# Altium PCB Copy of PCB_MolkkyV2.PcbDoc
Units mm, origin at the board's own origin, x right, y up, seen from the top; angles counter-clockwise.
Board outline 30.31 x 28.25 mm, 3 copper layers (Top Layer, Internal Plane 13, Bottom Layer); 22 components, 17 nets, 111 pads, 10 vias.
Unrouted connection lines stored in the file: 20.
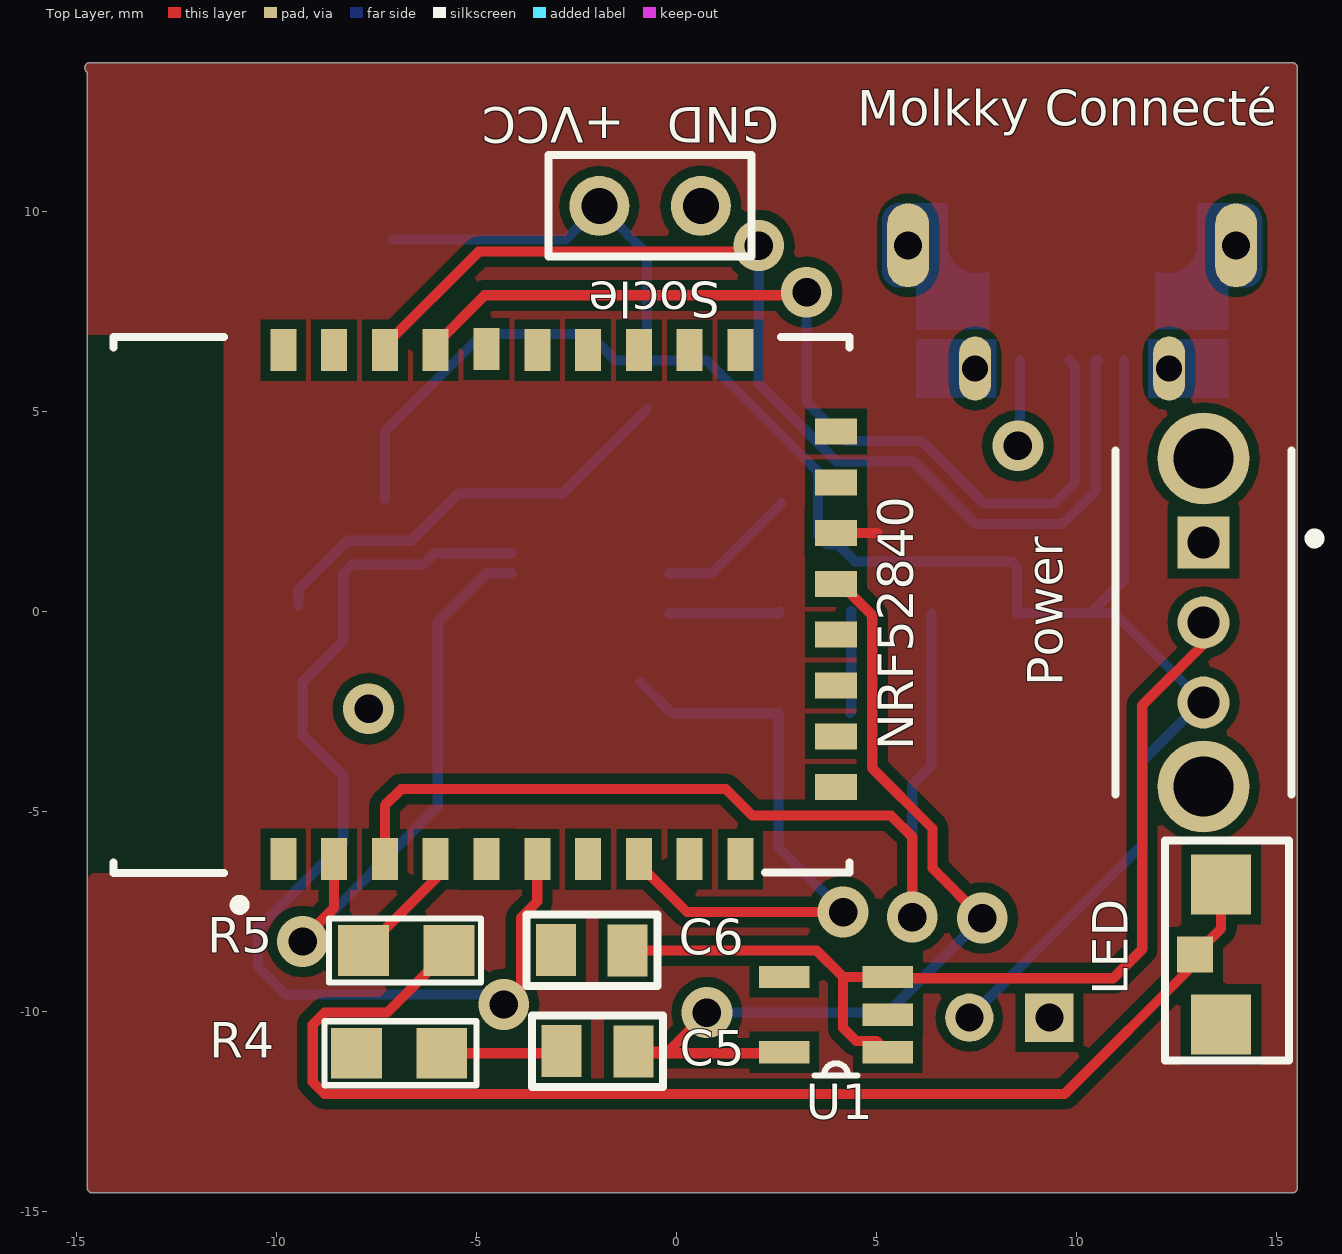
[diagram p0: Top Layer view]
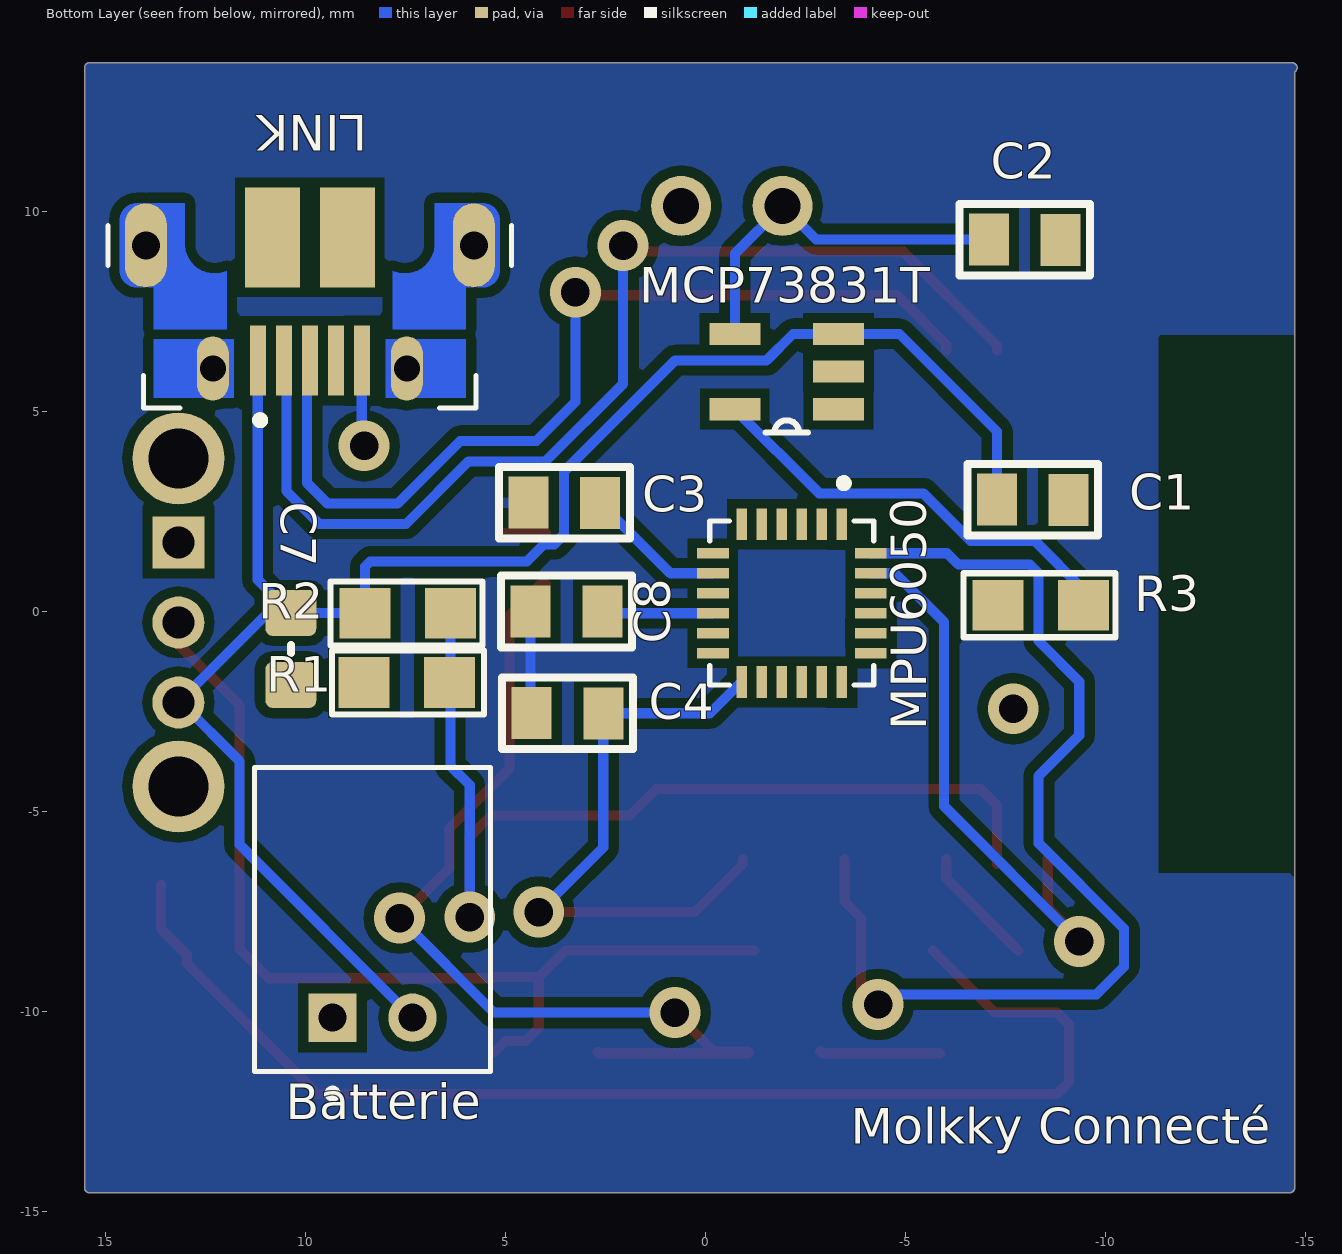
[diagram p1: Bottom Layer view, seen from below]
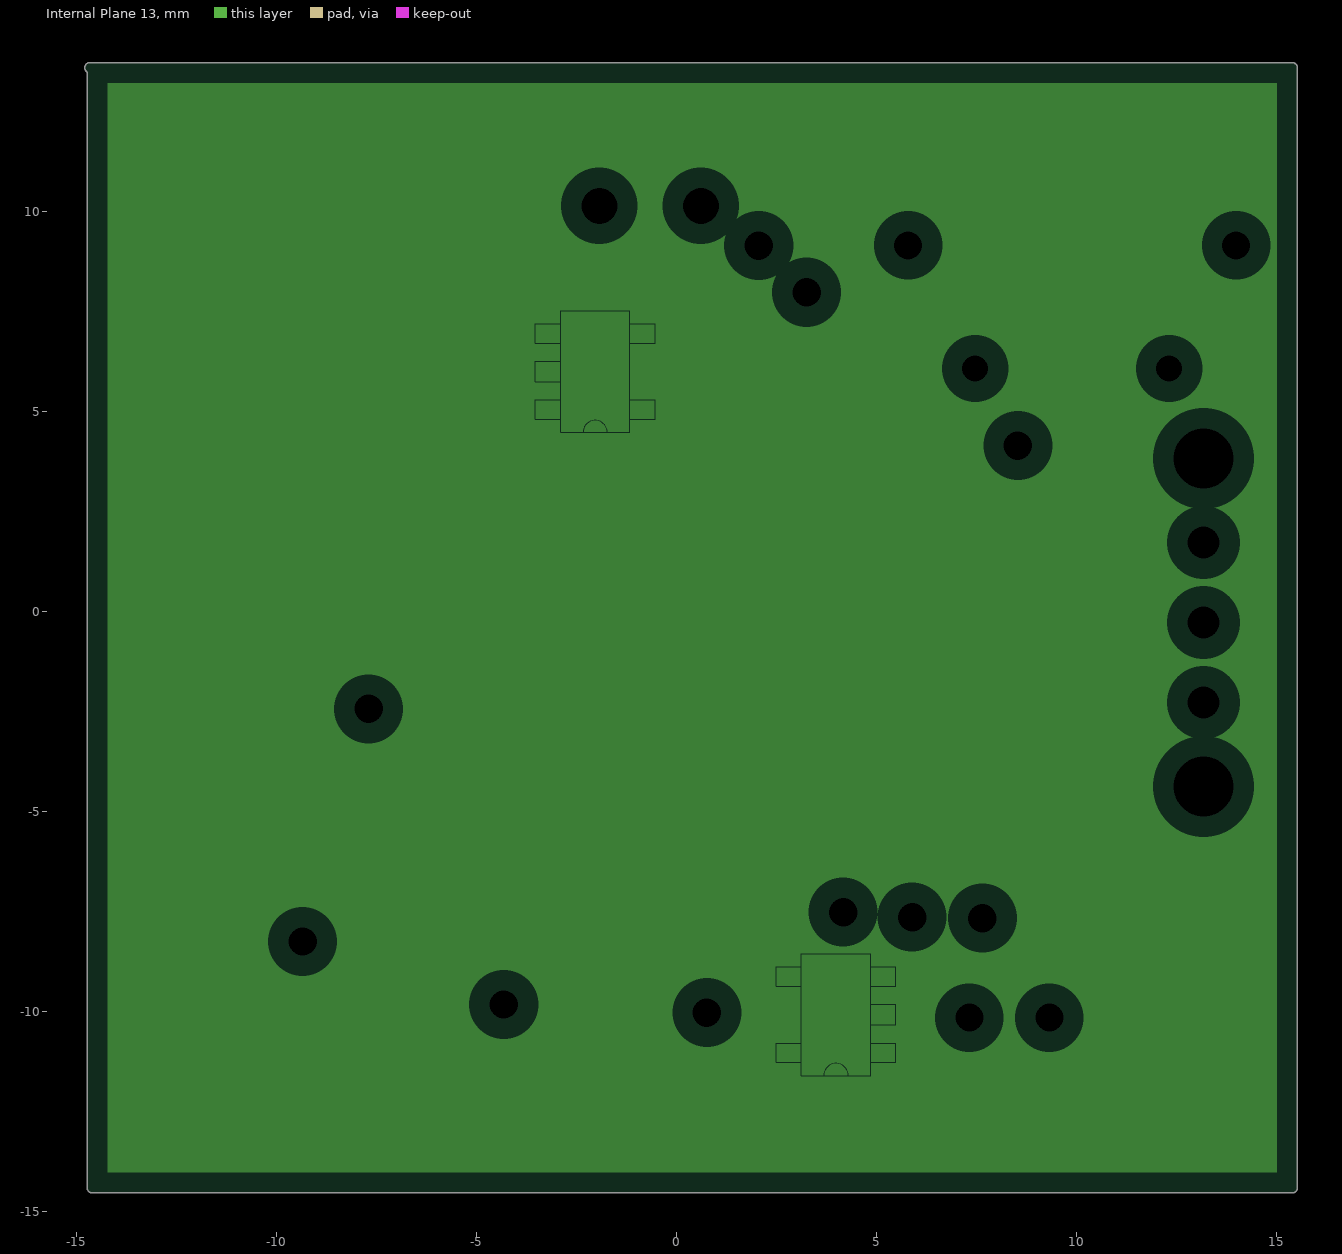
[diagram p2: Internal Plane 13, clearances drawn from the general rule]

## Layer stack, top to bottom
Top Solder: solder mask 0.0102, Solder Resist, Dk 3.5
Top Layer: signal copper 0.0356
Dielectric 1: dielectric 0.32, FR-4, Dk 4.8
Internal Plane 13: plane copper 0.0356
Dielectric2: dielectric 0.32, FR-4, Dk 4.8
Bottom Layer: signal copper 0.0356
Bottom Solder: solder mask 0.0102, Solder Resist, Dk 3.5

## Board outline
-14.732,-14.411 -14.732,13.481 cw(c-14.665,13.589) -14.665,13.716 15.335,13.716 cw(c15.335,13.589) 15.365,13.713 cw(c15.395,13.589) 15.522,13.589 15.522,-14.411 cw(c15.395,-14.411) 15.395,-14.538 -14.605,-14.538 cw(c-14.605,-14.411)

## Design rules (kind name [scope] priority, off if disabled: settings)
Clearance [All] p1: gap=0.254 ignorepadtopadclearanceinfootprint=FALSE except(0: Arc-Hole Track-Hole SMDPad-Hole THPad-Hole Via-Hole Fill-Hole Poly-Hole Region-Hole Text-Hole; 0.242: SMDPad-SMDPad SMDPad-THPad SMDPad-Via SMDPad-Fill SMDPad-Poly SMDPad-Region SMDPad-Text THPad-THPad THPad-Via THPad-Fill THPad-Poly THPad-Region THPad-Text)
PlaneClearance [All] p1: clearance=0.508
PlaneConnect [All] p1: planeconnectstyle=Relief reliefexpansion=0.508 reliefentries=4 reliefconductorwidth=0.254 reliefairgap=0.254
PolygonConnect [All] p1: connectstyle=Relief reliefconductorwidth=0.254 reliefentries=4 polygonreliefangle="90 Angle" airgapwidth=0.254
RoutingVias [All] p1: holewidth=0.711 width=1.27 viastyle="Through Hole" minholewidth=0.711 minwidth=1.27 maxholewidth=0.711 maxwidth=1.27
SolderMaskExpansion [All] p1: expansion=0.102
Width [All] p1: maxlimit=0.4 minlimit=0.24 preferedwidth=0.254 minimp=50.000000 maximp=50.000000 favimp=50.000000
28 further rules are at their usual default settings.

## Classes and differential pairs
component class MolkkyV2: C1 C2 C3 C4 C5 C6 C7 C8 LED Link MCP73831T MPU6050 NRF52840 R1 R2 R3 R4 R5 Socle

## Components (designator, comment, footprint, x,y, rotation, side; value= is the part's Value field where it differs from the comment)
Batterie "S2B-PH-K-S(LF)(SN)" *JST_S2B-PH-K-S(LF)(SN) 8.322,-10.16 r0 bottom (schematic designator ConnecteurBatt)
C1 "CMS_0805" CONDENSATEUR_CMS_0805 -9.08,2.784 r0 bottom value=4.7uF
C2 "CMS_0805" CONDENSATEUR_CMS_0805 -8.877,9.286 r0 bottom value=4.7uF
C3 "CMS_0805" CONDENSATEUR_CMS_0805 2.63,2.708 r0 bottom value="10 nF"
C4 "CMS_0805" CONDENSATEUR_CMS_0805 2.553,-2.55 r0 bottom value="0.1 uF"
C5 "CMS_0805" CONDENSATEUR_CMS_0805 -1.08,-11.008 r180 top value="4.7 uF"
C6 "CMS_0805" CONDENSATEUR_CMS_0805 -1.219,-8.484 r180 top value="1 uF"
C7 "100n" CAPC2013X100N-0805-NoOverlay 10.363,-0.94 r0 bottom
C8 "CMS_0805" CONDENSATEUR_CMS_0805 2.579,-0.01 r0 bottom value="0.1 uF"
LED "LED_3MM" LED_Angle_droit 13.614,-10.333 r180 top (schematic designator D1)
LINK "10103592-0001LF" *AMPHENOL_10103592-0001LF_10103592-0001LF(Primary) 9.891,9.149 r0 bottom (schematic designator J1)
MCP73831T "MCP73831T-2ACI/OT" *SOT95P280X145-5N -2.032,5.994 r0 bottom (schematic designator 1)
MPU6050 "MPU-6050" *QFN50P400X400X95-24N -2.159,0.203 r270 bottom (schematic designator U2)
NRF52840 "NRF52840 kit" uC_NRF52840 39.497,32.029 r90 top locked (schematic designator uC)
Power "Switch_C&K_OS102011MA1QN1_eec" C&K_OS102011MA1QN1_0 11.176,-0.279 r270 top (schematic designator SW1)
R1 "RESISTANCE_CMS_0805" RESISTANCE_CMS_0805 8.534,-1.778 r180 bottom value=100K
R2 "RESISTANCE_CMS_0805" RESISTANCE_CMS_0805 6.375,-0.051 r0 bottom value=100K
R3 "RESISTANCE_CMS_0805" RESISTANCE_CMS_0805 -9.449,0.152 r0 bottom value=10K
R4 "RESISTANCE_CMS_0805" RESISTANCE_CMS_0805 -8.001,-11.049 r0 top value=1
R5 "RESISTANCE_CMS_0805" RESISTANCE_CMS_0805 -5.69,-8.484 r180 top value=2.2K
Socle "ConnecteurCharge" "BARRETTE 2" 3.15,10.135 r180 top (schematic designator *)
U1 "TPS76333DBVT" *SOT95P280X145-5N 3.988,-10.084 r180 top

## Footprints (in the part's own frame and the unit in brackets; to place one, negate y for a bottom-side part, rotate by r counter-clockwise, add the part's x,y. Pads: shape width x height; smd on the part's side, far side on the other; paste and mask are expansions set on the pad)
*AMPHENOL_10103592-0001LF_10103592-0001LF(Primary) [mm]
  rect 0.4x1.75 smd: 1(1.3,2.875) 2(0.65,2.875) 3(0,2.875) 4(-0.65,2.875) 5(-1.3,2.875)
  oval 0.8x1.6 hole 0.65: P1(-2.425,3.08) P2(2.425,3.08)
  oval 1.05x2.1 hole 0.7: P3(-4.1,0) P6(4.1,0)
  rect 1.375x2.5 smd: P4(-0.937,-0.2) P5(0.937,-0.2)
  Top Layer region: -3.9,3.81 -2.65,3.81 -2.656,3.807 -2.664,3.801 -2.673,3.794 -2.682,3.788 -2.69,3.781 -2.698,3.774 -2.706,3.767 -2.714,3.76 -2.721,3.752 -2.729,3.744 -2.736,3.736 -2.743,3.728 -2.749,3.72 -2.755,3.711 -2.762,3.702 -2.767,3.693 -2.773,3.684 -2.778,3.675 -2.783,3.666 -2.788,3.656 -2.792,3.646 -2.797,3.636 -2.8,3.626 -2.804,3.616 -2.807,3.606 -2.81,3.596 -2.813,3.586 -2.816,3.575 -2.818,3.565 -2.819,3.554 -2.82,3.55 -2.81,2.59 -2.808,2.584 -2.805,2.573 -2.802,2.563 -2.798,2.553 -2.794,2.543 -2.79,2.533 -2.785,2.523 -2.781,2.514 -2.775,2.504 -2.77,2.495 -2.764,2.486 -2.759,2.477 -2.752,2.468 -2.746,2.459 -2.739,2.451 -2.732,2.443 -2.725,2.435 -2.718,2.427 -2.71,2.419 -2.702,2.412 -2.694,2.405 -2.686,2.398 -2.678,2.391 -2.669,2.385 -2.66,2.379 -2.651,2.373 -2.642,2.367 -2.633,2.362 -2.623,2.357 -2.614,2.352 -2.61,2.35 -3.9,2.35
  Top Layer region: -2.2,3.81 -1.9,3.81 -1.9,2.35 -2.21,2.35 -2.207,2.352 -2.198,2.357 -2.189,2.363 -2.18,2.37 -2.171,2.376 -2.162,2.383 -2.154,2.39 -2.146,2.397 -2.138,2.405 -2.13,2.412 -2.123,2.42 -2.116,2.428 -2.109,2.437 -2.102,2.445 -2.095,2.454 -2.089,2.463 -2.083,2.472 -2.077,2.481 -2.072,2.491 -2.067,2.5 -2.062,2.51 -2.057,2.52 -2.053,2.53 -2.049,2.54 -2.045,2.55 -2.042,2.56 -2.039,2.571 -2.036,2.581 -2.033,2.592 -2.031,2.603 -2.03,2.61 -2.04,3.58 -2.041,3.583 -2.043,3.592 -2.045,3.6 -2.048,3.609 -2.051,3.618 -2.054,3.626 -2.057,3.635 -2.061,3.643 -2.065,3.651 -2.069,3.659 -2.073,3.667 -2.078,3.675 -2.083,3.683 -2.088,3.69 -2.093,3.698 -2.098,3.705 -2.104,3.712 -2.11,3.719 -2.116,3.726 -2.122,3.732 -2.129,3.739 -2.135,3.745 -2.142,3.751 -2.149,3.757 -2.156,3.762 -2.164,3.768 -2.171,3.773 -2.179,3.778 -2.187,3.783 -2.195,3.787 -2.2,3.79
  Top Layer region: 3.9,3.81 2.65,3.81 2.656,3.807 2.664,3.801 2.673,3.794 2.682,3.788 2.69,3.781 2.698,3.774 2.706,3.767 2.714,3.76 2.721,3.752 2.729,3.744 2.736,3.736 2.743,3.728 2.749,3.72 2.755,3.711 2.762,3.702 2.767,3.693 2.773,3.684 2.778,3.675 2.783,3.666 2.788,3.656 2.792,3.646 2.797,3.636 2.8,3.626 2.804,3.616 2.807,3.606 2.81,3.596 2.813,3.586 2.816,3.575 2.818,3.565 2.819,3.554 2.82,3.55 2.81,2.59 2.808,2.584 2.805,2.573 2.802,2.563 2.798,2.553 2.794,2.543 2.79,2.533 2.785,2.523 2.781,2.514 2.775,2.504 2.77,2.495 2.764,2.486 2.759,2.477 2.752,2.468 2.746,2.459 2.739,2.451 2.732,2.443 2.725,2.435 2.718,2.427 2.71,2.419 2.702,2.412 2.694,2.405 2.686,2.398 2.678,2.391 2.669,2.385 2.66,2.379 2.651,2.373 2.642,2.367 2.633,2.362 2.623,2.357 2.614,2.352 2.61,2.35 3.9,2.35
  Top Layer region: 2.2,3.81 1.9,3.81 1.9,2.35 2.21,2.35 2.207,2.352 2.198,2.357 2.189,2.363 2.18,2.37 2.171,2.376 2.162,2.383 2.154,2.39 2.146,2.397 2.138,2.405 2.13,2.412 2.123,2.42 2.116,2.428 2.109,2.437 2.102,2.445 2.095,2.454 2.089,2.463 2.083,2.472 2.077,2.481 2.072,2.491 2.067,2.5 2.062,2.51 2.057,2.52 2.053,2.53 2.049,2.54 2.045,2.55 2.042,2.56 2.039,2.571 2.036,2.581 2.033,2.592 2.031,2.603 2.03,2.61 2.04,3.58 2.041,3.583 2.043,3.592 2.045,3.6 2.048,3.609 2.051,3.618 2.054,3.626 2.057,3.635 2.061,3.643 2.065,3.651 2.069,3.659 2.073,3.667 2.078,3.675 2.083,3.683 2.088,3.69 2.093,3.698 2.098,3.705 2.104,3.712 2.11,3.719 2.116,3.726 2.122,3.732 2.129,3.739 2.135,3.745 2.142,3.751 2.149,3.757 2.156,3.762 2.164,3.768 2.171,3.773 2.179,3.778 2.187,3.783 2.195,3.787 2.2,3.79
  Top Layer region: 2.075,2.1 3.9,2.1 3.9,1.05 4.075,1.05 4.075,1.045 4.058,1.044 4.033,1.042 4.008,1.038 3.983,1.033 3.958,1.026 3.934,1.019 3.91,1.01 3.887,1 3.864,0.989 3.842,0.977 3.82,0.964 3.799,0.95 3.779,0.935 3.759,0.918 3.74,0.901 3.723,0.883 3.706,0.864 3.69,0.844 3.675,0.824 3.661,0.803 3.648,0.781 3.637,0.758 3.626,0.735 3.617,0.712 3.608,0.688 3.601,0.663 3.595,0.639 3.591,0.614 3.587,0.588 3.585,0.563 3.585,0.555 3.58,-0.53 3.58,-0.538 3.581,-0.564 3.584,-0.59 3.588,-0.615 3.593,-0.641 3.599,-0.666 3.607,-0.69 3.615,-0.714 3.625,-0.738 3.636,-0.762 3.649,-0.784 3.662,-0.806 3.676,-0.828 3.692,-0.848 3.708,-0.868 3.726,-0.887 3.744,-0.905 3.763,-0.922 3.783,-0.939 3.804,-0.954 3.825,-0.968 3.848,-0.981 3.87,-0.993 3.894,-1.004 3.918,-1.014 3.942,-1.022 3.967,-1.029 3.992,-1.035 4.017,-1.04 4.043,-1.044 4.06,-1.045 4.06,-1.05 3.125,-1.05 3.125,0 3.123,0.029 3.117,0.076 3.107,0.123 3.095,0.17 3.079,0.215 3.061,0.26 3.04,0.303 3.016,0.345 2.99,0.385 2.961,0.423 2.93,0.46 2.896,0.494 2.86,0.526 2.823,0.556 2.783,0.583 2.742,0.608 2.699,0.63 2.655,0.649 2.61,0.666 2.564,0.679 2.517,0.69 2.47,0.697 2.422,0.702 2.374,0.703 2.326,0.702 2.278,0.697 2.231,0.689 2.184,0.678 2.138,0.665 2.093,0.648 2.075,0.64
  Top Layer region: 4.13,1.05 4.341,1.05 4.363,1.049 4.385,1.047 4.407,1.043 4.428,1.039 4.449,1.033 4.47,1.026 4.491,1.018 4.511,1.009 4.53,0.999 4.55,0.988 4.568,0.976 4.586,0.963 4.603,0.949 4.619,0.935 4.635,0.919 4.649,0.903 4.663,0.886 4.676,0.868 4.688,0.85 4.699,0.83 4.709,0.811 4.718,0.791 4.726,0.77 4.733,0.749 4.739,0.728 4.743,0.707 4.747,0.685 4.749,0.663 4.75,0.641 4.75,-0.641 4.749,-0.663 4.747,-0.685 4.743,-0.707 4.739,-0.728 4.733,-0.749 4.726,-0.77 4.718,-0.791 4.709,-0.811 4.699,-0.83 4.688,-0.85 4.676,-0.868 4.663,-0.886 4.649,-0.903 4.635,-0.919 4.619,-0.935 4.603,-0.949 4.586,-0.963 4.568,-0.976 4.55,-0.988 4.53,-0.999 4.511,-1.009 4.491,-1.018 4.47,-1.026 4.449,-1.033 4.428,-1.039 4.407,-1.043 4.385,-1.047 4.363,-1.049 4.341,-1.05 4.105,-1.05 4.105,-1.045 4.116,-1.045 4.143,-1.044 4.17,-1.041 4.197,-1.037 4.223,-1.031 4.25,-1.024 4.275,-1.015 4.301,-1.006 4.325,-0.995 4.35,-0.982 4.373,-0.969 4.396,-0.954 4.418,-0.938 4.439,-0.921 4.459,-0.903 4.478,-0.884 4.496,-0.864 4.513,-0.843 4.529,-0.821 4.544,-0.798 4.557,-0.775 4.57,-0.75 4.581,-0.726 4.59,-0.7 4.599,-0.675 4.606,-0.648 4.612,-0.622 4.616,-0.595 4.619,-0.568 4.62,-0.541 4.62,-0.525 4.62,0.555 4.62,0.563 4.618,0.588 4.614,0.614 4.61,0.639 4.604,0.663 4.597,0.688 4.588,0.712 4.579,0.735 4.568,0.758 4.557,0.781 4.544,0.803 4.53,0.824 4.515,0.844 4.499,0.864 4.482,0.883 4.465,0.901 4.446,0.918 4.426,0.935 4.406,0.95 4.385,0.964 4.363,0.977 4.341,0.989 4.318,1 4.295,1.01 4.271,1.019 4.247,1.026 4.222,1.033 4.197,1.038 4.172,1.042 4.147,1.044 4.13,1.045
  Top Layer region: -2.075,2.1 -3.9,2.1 -3.9,1.05 -4.075,1.05 -4.075,1.045 -4.058,1.044 -4.033,1.042 -4.008,1.038 -3.983,1.033 -3.958,1.026 -3.934,1.019 -3.91,1.01 -3.887,1 -3.864,0.989 -3.842,0.977 -3.82,0.964 -3.799,0.95 -3.779,0.935 -3.759,0.918 -3.74,0.901 -3.723,0.883 -3.706,0.864 -3.69,0.844 -3.675,0.824 -3.661,0.803 -3.648,0.781 -3.637,0.758 -3.626,0.735 -3.617,0.712 -3.608,0.688 -3.601,0.663 -3.595,0.639 -3.591,0.614 -3.587,0.588 -3.585,0.563 -3.585,0.555 -3.58,-0.53 -3.58,-0.538 -3.581,-0.564 -3.584,-0.59 -3.588,-0.615 -3.593,-0.641 -3.599,-0.666 -3.607,-0.69 -3.615,-0.714 -3.625,-0.738 -3.636,-0.762 -3.649,-0.784 -3.662,-0.806 -3.676,-0.828 -3.692,-0.848 -3.708,-0.868 -3.726,-0.887 -3.744,-0.905 -3.763,-0.922 -3.783,-0.939 -3.804,-0.954 -3.825,-0.968 -3.848,-0.981 -3.87,-0.993 -3.894,-1.004 -3.918,-1.014 -3.942,-1.022 -3.967,-1.029 -3.992,-1.035 -4.017,-1.04 -4.043,-1.044 -4.06,-1.045 -4.06,-1.05 -3.125,-1.05 -3.125,0 -3.123,0.029 -3.117,0.076 -3.107,0.123 -3.095,0.17 -3.079,0.215 -3.061,0.26 -3.04,0.303 -3.016,0.345 -2.99,0.385 -2.961,0.423 -2.93,0.46 -2.896,0.494 -2.86,0.526 -2.823,0.556 -2.783,0.583 -2.742,0.608 -2.699,0.63 -2.655,0.649 -2.61,0.666 -2.564,0.679 -2.517,0.69 -2.47,0.697 -2.422,0.702 -2.374,0.703 -2.326,0.702 -2.278,0.697 -2.231,0.689 -2.184,0.678 -2.138,0.665 -2.093,0.648 -2.075,0.64
  Top Layer region: -4.13,1.05 -4.341,1.05 -4.363,1.049 -4.385,1.047 -4.407,1.043 -4.428,1.039 -4.449,1.033 -4.47,1.026 -4.491,1.018 -4.511,1.009 -4.53,0.999 -4.55,0.988 -4.568,0.976 -4.586,0.963 -4.603,0.949 -4.619,0.935 -4.635,0.919 -4.649,0.903 -4.663,0.886 -4.676,0.868 -4.688,0.85 -4.699,0.83 -4.709,0.811 -4.718,0.791 -4.726,0.77 -4.733,0.749 -4.739,0.728 -4.743,0.707 -4.747,0.685 -4.749,0.663 -4.75,0.641 -4.75,-0.641 -4.749,-0.663 -4.747,-0.685 -4.743,-0.707 -4.739,-0.728 -4.733,-0.749 -4.726,-0.77 -4.718,-0.791 -4.709,-0.811 -4.699,-0.83 -4.688,-0.85 -4.676,-0.868 -4.663,-0.886 -4.649,-0.903 -4.635,-0.919 -4.619,-0.935 -4.603,-0.949 -4.586,-0.963 -4.568,-0.976 -4.55,-0.988 -4.53,-0.999 -4.511,-1.009 -4.491,-1.018 -4.47,-1.026 -4.449,-1.033 -4.428,-1.039 -4.407,-1.043 -4.385,-1.047 -4.363,-1.049 -4.341,-1.05 -4.105,-1.05 -4.105,-1.045 -4.116,-1.045 -4.143,-1.044 -4.17,-1.041 -4.197,-1.037 -4.223,-1.031 -4.25,-1.024 -4.275,-1.015 -4.301,-1.006 -4.325,-0.995 -4.35,-0.982 -4.373,-0.969 -4.396,-0.954 -4.418,-0.938 -4.439,-0.921 -4.459,-0.903 -4.478,-0.884 -4.496,-0.864 -4.513,-0.843 -4.529,-0.821 -4.544,-0.798 -4.557,-0.775 -4.57,-0.75 -4.581,-0.726 -4.59,-0.7 -4.599,-0.675 -4.606,-0.648 -4.612,-0.622 -4.616,-0.595 -4.619,-0.568 -4.62,-0.541 -4.62,-0.525 -4.62,0.555 -4.62,0.563 -4.618,0.588 -4.614,0.614 -4.61,0.639 -4.604,0.663 -4.597,0.688 -4.588,0.712 -4.579,0.735 -4.568,0.758 -4.557,0.781 -4.544,0.803 -4.53,0.824 -4.515,0.844 -4.499,0.864 -4.482,0.883 -4.465,0.901 -4.446,0.918 -4.426,0.935 -4.406,0.95 -4.385,0.964 -4.363,0.977 -4.341,0.989 -4.318,1 -4.295,1.01 -4.271,1.019 -4.247,1.026 -4.222,1.033 -4.197,1.038 -4.172,1.042 -4.147,1.044 -4.13,1.045
  silkscreen extent -5.04,-0.5 5.04,4.47
*JST_S2B-PH-K-S(LF)(SN) [mm]
  rect 1.208x1.208 hole 0.7: 1(1,0)
  round 1.208 hole 0.7: 2(-1,0)
  silkscreen extent -2.95,-6.25 2.95,2
*QFN50P400X400X95-24N [mm]
  rect 0.79x0.26 smd: 1(-1.97,1.25) 2(-1.97,0.75) 3(-1.97,0.25) 4(-1.97,-0.25) 5(-1.97,-0.75) 6(-1.97,-1.25) 13(1.97,-1.25) 14(1.97,-0.75) 15(1.97,-0.25) 16(1.97,0.25) 17(1.97,0.75) 18(1.97,1.25)
  rect 0.26x0.79 smd: 7(-1.25,-1.97) 8(-0.75,-1.97) 9(-0.25,-1.97) 10(0.25,-1.97) 11(0.75,-1.97) 12(1.25,-1.97) 19(1.25,1.97) 20(0.75,1.97) 21(0.25,1.97) 22(-0.25,1.97) 23(-0.75,1.97) 24(-1.25,1.97)
  silkscreen extent -3.1,-2.05 2.05,2.05
*SOT95P280X145-5N [mil]
  rect 50x22 smd: 1(-51,37) 2(-51,0) 3(-51,-37) 4(51,-37) 5(51,37)
  Internal Plane 13 lines w0: -59,47 -34,47 ; -59,47 -59,28 ; -59,47 -34,47 ; -59,47 -59,28 ; -59,28 -34,28 ; -59,28 -34,28 ; -59,10 -34,10 ; -59,10 -59,-10 ; -59,10 -34,10 ; -59,10 -59,-10 ; -59,-10 -34,-10 ; -59,-10 -34,-10 ; -59,-28 -34,-28 ; -59,-28 -59,-47 ; -59,-28 -34,-28 ; -59,-28 -59,-47 ; -59,-47 -34,-47 ; -59,-47 -34,-47 ; -34,60 -12,60 ; -34,60 -34,47 ; -34,60 -12,60 ; -34,60 -34,47 ; -34,47 -34,28 ; -34,47 -34,28 ; -34,28 -34,10 ; -34,28 -34,10 ; -34,10 -34,-10 ; -34,10 -34,-10 ; -34,-10 -34,-28 ; -34,-10 -34,-28 ; -34,-28 -34,-47 ; -34,-28 -34,-47 ; -34,-47 -34,-60 ; -34,-47 -34,-60 ; -34,-60 34,-60 ; -34,-60 34,-60 ; -12,60 ccw(c0,60) 12,60 ; -12,60 ccw(c0,60) 12,60 ; -12,60 12,60 ; -12,60 12,60 ; 12,60 34,60 ; 12,60 34,60 ; 34,60 34,47 ; 34,60 34,47 ; 34,47 34,28 ; 34,47 59,47 ; 34,47 34,28 ; 34,47 59,47 ; 34,28 34,-28 ; 34,28 59,28 ; 34,28 34,-28 ; 34,28 59,28 ; 34,-28 34,-47 ; 34,-28 59,-28 ; 34,-28 34,-47 ; 34,-28 59,-28 ; 34,-47 34,-60 ; 34,-47 59,-47 ; 34,-47 34,-60 ; 34,-47 59,-47 ; 59,47 59,28 ; 59,47 59,28 ; 59,-28 59,-47 ; 59,-28 59,-47
  silkscreen extent -21,48 21,60
"BARRETTE 2" [mm] "BARRETTE 3 CONTACTS ; 1 RANGEE ; DROITE ; MALE ; ESPACEMENT BROCHES = 2.54 mm"
  round 1.5 hole 0.9: 1(2.54,0) 2(5.08,0)
  silkscreen extent 1.27,-1.27 6.35,1.27
C&K_OS102011MA1QN1_0 [mm]
  rect 1.3x1.3 hole 0.8 paste-1000 mask+0: 1(-2,2)
  round 1.3 hole 0.8 paste-1000 mask+0: 2(0,2) 3(2,2)
  round 2.3 hole 1.5 paste-1000 mask+0: 4(-4.1,2) 5(4.1,2)
  silkscreen extent -4.3,-0.2 4.3,4.9, body extent -5.35,-4.3 5.35,4.3, height 0.25
CAPC2013X100N-0805-NoOverlay [mm] "Capacitor,non-polarized,Chip;2.00mm L X 1.25mm W X 1.00mm H"
  rrect30% 1.27x1.15 smd: 1(0,0.9) 2(0,-0.9)
  silkscreen extent 0,-0.1 0,0.1, body extent -0.62,-1 0.63,1, height 0.6
CONDENSATEUR_CMS_0805 [mm] "CONDENSATEUR CMS 0805 ; DIMENSIONS : 2mm x 1.25mm"
  rect 1x1.3 smd: 1(0,0) 2(1.79,-0.01)
  silkscreen extent -0.74,-0.9 2.53,0.89, body extent -0.09,-0.67 1.91,0.64, height 0.73
LED_Angle_droit [mm] "LED CMS 0805 ; DIMENSIONS : 2.0mm x 0.9mm"
  rect 1.5x1.5 smd: 1(0,-3.5) 2(0,0)
  rect 0.9x0.9 smd: 1(0.65,-1.75)
  silkscreen extent -1.7,-4.6 1.4,0.9, body extent -1.5,-3.35 2.7,-0.25, height 2
RESISTANCE_CMS_0805 [mil] "RESISTANCE CMS 0805 ; DIMENSIONS : 2mm x 1.25mm"
  rect 50x50 smd: 1(0,0) 2(84,0)
  silkscreen extent -31,-31 118,31, body extent 4,-24 83,26, height 31
uC_NRF52840 [mm] "QFN, 40-Leads, Body 13,05x18,05mm, Pitch 1,27mm, Thermal Pad 8,90x8,90mm, IPC Medium Density"
  rect 1.05x0.65 smd: 1(-38.227,49.327) 2(-38.227,48.057) 3(-38.227,46.787) 4(-38.227,45.517) 5(-38.227,44.247) 6(-38.227,42.977) 7(-38.227,41.707) 8(-38.227,40.437) 9(-38.227,39.167) 10(-38.227,37.897) 21(-25.502,37.897) 22(-25.502,39.167) 23(-25.502,40.437) 24(-25.5,41.708) 25(-25.502,42.977) 26(-25.476,44.247) 27(-25.502,45.517) 28(-25.502,46.787) 29(-25.502,48.057) 30(-25.502,49.327)
  rect 0.65x1.05 smd: 11(-36.424,35.509) 12(-35.154,35.509) 13(-33.884,35.509) 14(-32.614,35.509) 15(-31.344,35.509) 16(-30.074,35.509) 17(-28.804,35.509) 18(-27.534,35.509)
  silkscreen extent -39.49,35.17 -25.18,53.57, body extent -38.43,35.31 -25.6,53.29, height 3.1

## Part data
Batterie: "PH Series 2 Position 2.0 mm Through Hole Side Entry Shrouded Header", Package=None, Availability=Unavailable, MF="JST Sales", MP=S2B-PH-K-S_LF__SN_, Price=None, SnapEDA_Link=https://www.snapeda.com/parts/S2B-PH-K-S%28LF%29%28SN%29/JST%20Sales%20America%20Inc./view-part/?ref=snap
C1 C2 C3 C4 C5 C6 C8: library part CONDENSATEUR_CMS_CER_0805, "CONDENSATEUR CMS CERAMIQUE 0805"
C7: library part 0100000001868, Manufacturer=Yageo, Manufacturer Part Number=CC0805KRX7R9BB104, Package Case=0805, Recommended Rating=Platinum, Temperature Coefficient=X7R, Tolerance=10%, Voltage Rated=50, Assembly=SMD, Barcode=0100000001868, Capacitance=100n, Category=Capacitors, Family="CERAMIC CAPACITOR", id=136, item_id=450, Part Type=Capacitors
LED: library part "LED Angle droit", "LED Angle droit - ROUGE", Type=LED_Angle_droit
LINK: "Micro Usb, 2.0 Type b, Rcpt, Smt", Package=None, Availability=Unavailable, MF="Amphenol ICC", MP=10103592-0001LF, Price=None, SnapEDA_Link=https://www.snapeda.com/parts/10103592-0001LF/Amphenol%20ICC/view-part/?ref=snap
MCP73831T: "MCP73831 Series Single-Cell Li-Ion/Li-Polymer Battery Charge Controller SOT-23-5", Package="SOT-23 Microchip", Availability=Unavailable, MF=Microchip, MP=MCP73831T-2ACI/OT, Price=None, SnapEDA_Link=https://www.snapeda.com/parts/MCP73831T-2ACI/OT/Microchip/view-part/?ref=snap
MPU6050: "3-axis gyroscope, 3-axis accelerometer in a 4x4x0.9 housing", Package="QFN-24 InvenSense", Availability=Unavailable, MF="TDK InvenSense", MP=MPU-6050, Price=None, SnapEDA_Link=https://www.snapeda.com/parts/MPU-6050/TDK%20InvenSense/view-part/?ref=snap
NRF52840: Supplier Part Number 1=NRF52840-QIAA-R, Supplier 1=TME
Power: "SWITCH SLIDE SPDT 100MA 12V", Digikey Part Number=CKN9559-ND, Manufacturer=C&K, Mouser Part Number=OS102011MA1QN1, Package=SW_SLIDE, Temperature="-30°C to +70°C", Temperature Range High=+70°C, Temperature Range Low=-30°C, ComponentLink1Description=Upverter, ComponentLink1URL=https://upverter.com/upn/revision/2b2ed0fd4d150582/, ComponentLink2Description=Datasheet, ComponentLink2URL=https://www.ckswitches.com/media/1428/os.pdf, Digikey Description="SWITCH SLIDE SPDT 100MA 12V", helpURL=https://upverter.com/upn/revision/2b2ed0fd4d150582/, Lead Free=yes, Part Number=OS102011MA1QN1, Price=0.290275964971, RoHS=TRUE, Supplier 1=Digi-Key, Supplier 2=Mouser, Supplier Part Number 1=CKN9559-ND, Supplier Part Number 2=OS102011MA1QN1
R1 R2 R3 R4 R5: "RESISTANCE CMS 0805", Type=CMS_0805
Socle: library part "Barrette 2"
U1: "LDO voltage regulator [Texas Instruments] TPS76333DBVT LDO voltage regulator", Package="SOT-23-5 Texas Instruments", Availability=Unavailable, MF="Texas Instruments", MP=TPS76333DBVT, Price=None, SnapEDA_Link=https://www.snapeda.com/parts/TPS76333DBVT/Texas%20Instruments/view-part/?ref=snap

## Via types
v1: diameter 1.27, hole 0.711, Top Layer to Bottom Layer, 10 vias

## Nets (pads, with @x,y where several pads share a name; then routed paths per layer and width w, separated by ;. In a path a pad name is that pad's centre, name@x,y a point inside that pad or via, vN(x,y) a via of type N, cw(c..) or ccw(c..) an arc to the next point about the centre after c; other vN are vias at no path point)
3v3: Batterie.2 C1.2 C7.2 LINK.1 MCP73831T.3 Power.3 R2.2 | length 45.6
  Bottom Layer w0.254: C1.2 -7.29,4.496 -4.851,6.934 MCP73831T.3 -2.19,6.934 -1.529,6.274 0.752,6.274 3.539,3.488 3.539,1.91 3.772,1.676 4.033,1.676 4.465,1.245 8.382,1.245 8.509,1.118 R2.2 8.52,-0.04 C7.2 ; Batterie.2 11.645,-5.837 11.645,-3.745 13.111,-2.279 Power.3 10.936,-0.04 C7.2 ; LINK.1 11.191,0.788 C7.2
GND: Batterie.1 C1.1 C2.1 C3.2 C4.2 C6.2 C7.1 C8.2 LED.2 LINK.5 MCP73831T.2 MPU6050.1 MPU6050.18 MPU6050.20 NRF52840.5 NRF52840.16 R1.1 R3.2 R4.1 Socle.1 U1.2 | length 5.7
  Top Layer w0.254: NRF52840.16 5.022,1.956
  Bottom Layer w0.254: C4.2 4.369,-2.515 C8.2 ; v1(8.534,4.14) 8.591,4.197 LINK.5
  other v1: -7.696,-2.438
LED: NRF52840.4 R5.2 | length 3
  Top Layer w0.254: R5.2 -6.02,-6.68 NRF52840.4
Net1_5: MCP73831T.5 R3.1 | length 11
  Bottom Layer w0.254: R3.1 -9.449,0.546 -8.232,1.763 -6.632,1.763 -5.446,2.949 -2.842,2.949 MCP73831T.5
Net*_2: C2.2 MCP73831T.4 Socle.2 | length 9.2
  Bottom Layer w0.254: C2.2 -2.769,9.296 Socle.2 -0.737,8.941 MCP73831T.4
NetC3_1: C3.1 MPU6050.8 | length 3.5
  Bottom Layer w0.254: MPU6050.8 0.875,0.953 C3.1
NetC5_2: C5.2 R4.2 | length 3
  Top Layer w0.254: R4.2 -2.921,-11.049 C5.2
NetC8_1: C8.1 MPU6050.10 | length 2.8
  Bottom Layer w0.254: MPU6050.10 2.542,-0.047 C8.1
NetD1_1: LED.1 R5.1 | length 31.4
  Top Layer w0.254: R5.1 -7.239,-10.033 -8.794,-10.033 -9.093,-10.332 -9.093,-11.766 -8.794,-12.065 9.703,-12.065 12.964,-8.803 12.964,-8.583 13.614,-7.933 LED.1@13.614,-6.833
SCL: MPU6050.23 NRF52840.2 | length 14.1
  Top Layer w0.254: v1(-9.347,-8.255) -9.347,-8.199 -8.56,-7.411 NRF52840.2
  Bottom Layer w0.254: v1(-9.347,-8.255) -5.969,-4.877 -5.969,-0.274 -4.742,0.953 MPU6050.23
SDA: MPU6050.24 NRF52840.6 | length 26.5
  Top Layer w0.254: v1(-4.318,-9.83) -3.89,-9.402 -3.89,-7.666 -3.48,-7.255 NRF52840.6
  Bottom Layer w0.254: v1(-4.318,-9.83) -4.572,-9.576 -9.779,-9.576 -10.465,-8.89 -10.465,-7.936 -8.331,-5.802 -8.331,-4.115 -9.347,-3.099 -9.347,-1.758 -8.331,-0.742 -8.331,0.945 -8.108,1.168 -6.325,1.168 -6.04,1.453 MPU6050.24
SWCLK: LINK.2 NRF52840.28 | length 27.5
  Top Layer w0.254: NRF52840.28 -7.29,6.647 -4.945,8.992 1.905,8.992 v1(2.057,9.144)
  Bottom Layer w0.254: v1(2.057,9.144) 2.057,5.687 3.996,3.749 5.921,3.749 7.486,2.184 9.652,2.184 10.472,3.004 10.472,6.274 LINK.2
SWD: LINK.3 NRF52840.27 | length 23.8
  Top Layer w0.254: NRF52840.27 -6.02,6.672 -4.792,7.899 3.175,7.899 v1(3.251,7.976)
  Bottom Layer w0.254: v1(3.251,7.976) 3.251,5.232 4.227,4.257 6.132,4.257 7.696,2.692 9.442,2.692 9.964,3.215 9.964,5.237 9.96,5.241 9.96,6.136 LINK.3@9.822,6.274
Tbatt: NRF52840.3 R1.2 R2.1 | length 25.5
  Top Layer w0.254: NRF52840.3@-7.29,-6.316 NRF52840.3 -7.29,-4.851 -6.883,-4.445 1.236,-4.445 1.897,-5.105 5.359,-5.105 5.893,-5.639 v1(5.893,-7.645)
  Bottom Layer w0.254: v1@5.486,-7.645 v1(5.893,-7.645) 5.893,-4.343 6.375,-3.861 R2.1
VCC: C6.1 Power.2 U1.1 U1.3 | length 24.9
  Top Layer w0.254: C6.1 3.505,-8.484 4.166,-9.144 ; U1.1 5.004,-10.744 4.49,-10.744 4.166,-10.419 4.166,-9.144 ; Power.2 13.176,-0.821 11.645,-2.352 11.645,-8.446 10.916,-9.175 5.314,-9.175 U1.3 4.166,-9.144
VCC33: C5.1 NRF52840.15 U1.5 | length 23.9
  Top Layer w0.254: v1(0.762,-10.033) -0.213,-11.008 C5.1 -1.08,-11.049 2.667,-11.049 U1.5 ; NRF52840.15 4.107,0.686 4.894,-0.101 4.894,-3.921 6.401,-5.428 6.401,-6.426 v1(7.645,-7.671)
  Bottom Layer w0.254: v1(0.762,-10.033) 5.283,-10.033 v1(7.645,-7.671)
VCCGYRO: C4.1 MPU6050.13 NRF52840.8 | length 15.1
  Top Layer w0.254: NRF52840.8 -0.94,-6.316 0.262,-7.518 v1(4.166,-7.518)
  Bottom Layer w0.254: MPU6050.13@-0.898,-1.767 -0.115,-2.55 C4.1 2.553,-5.906 v1(4.166,-7.518)
pads on no net: LINK.4 LINK.P1 LINK.P2 LINK.P3 LINK.P4 LINK.P5 LINK.P6 MCP73831T.1 MPU6050.2 MPU6050.3 MPU6050.4 MPU6050.5 MPU6050.6 MPU6050.7 MPU6050.9 MPU6050.11 MPU6050.12 MPU6050.14 MPU6050.15 MPU6050.16 MPU6050.17 MPU6050.19 MPU6050.21 MPU6050.22 NRF52840.1 NRF52840.7 NRF52840.9 NRF52840.10 NRF52840.11 NRF52840.12 NRF52840.13 NRF52840.14 NRF52840.17 NRF52840.18 NRF52840.21 NRF52840.22 NRF52840.23 NRF52840.24 NRF52840.25 NRF52840.26 NRF52840.29 NRF52840.30 Power.1 Power.4 Power.5 U1.4

## Polygon pours and split planes (outlines as drawn)
GND on Top Layer "GND_L01_P004" (solid, pour order 4): -14.732,-14.411 -14.732,13.481 cw(c-14.665,13.589) -14.665,13.716 15.335,13.716 cw(c15.335,13.589) 15.365,13.713 cw(c15.395,13.589) 15.522,13.589 15.522,-14.411 cw(c15.395,-14.411) 15.395,-14.538 -14.605,-14.538 cw(c-14.605,-14.411)
GND on Bottom Layer "GND_L03_P005" (solid, pour order 5): -14.732,-14.411 -14.732,13.481 cw(c-14.665,13.589) -14.665,13.716 15.335,13.716 cw(c15.335,13.589) 15.365,13.713 cw(c15.395,13.589) 15.522,13.589 15.522,-14.411 cw(c15.395,-14.411) 15.395,-14.538 -14.605,-14.538 cw(c-14.605,-14.411)
no net on Internal Plane 13 (split plane): 15.012,-14.028 -14.222,-14.028 -14.222,13.206 15.012,13.206

## Other copper
Top Layer:
  pour cut-out: -11.318,6.854 -11.372,6.909 -14.783,6.909 -14.783,-6.553 -14.757,-6.579 -14.724,-6.546 -11.318,-6.546
Bottom Layer:
  pour cut-out: -11.318,6.854 -11.372,6.909 -14.783,6.909 -14.783,-6.487 -14.724,-6.546 -11.318,-6.546

## Silkscreen, mask and mechanical layers (free items; w line width, h text height)
Top Overlay:
  text "+VCC" at -1.295,12.903 h1.52 r180
  text "GND" at 2.565,12.903 h1.52 r180
  text "Molkky Connecté" at 4.521,11.836 h1.52
Bottom Overlay:
  text "Molkky Connecté" at -3.632,-13.614 h1.52
Mechanical 1:
  lines w0.254: -14.665,13.589 15.335,13.589 ; -14.605,13.529 -14.605,-14.411 15.395,-14.411 15.395,13.589